# Altium PCB PCB-DC-DC-24-15_v.2.PcbDoc
Units mil, origin at the board's own origin, x right, y up, seen from the top; angles counter-clockwise.
Board outline 1456.69 x 1496.06 mil, 2 copper layers (Top Layer, Bottom Layer); 34 components, 20 nets, 91 pads, 26 vias.
Unrouted connection lines stored in the file: 1.
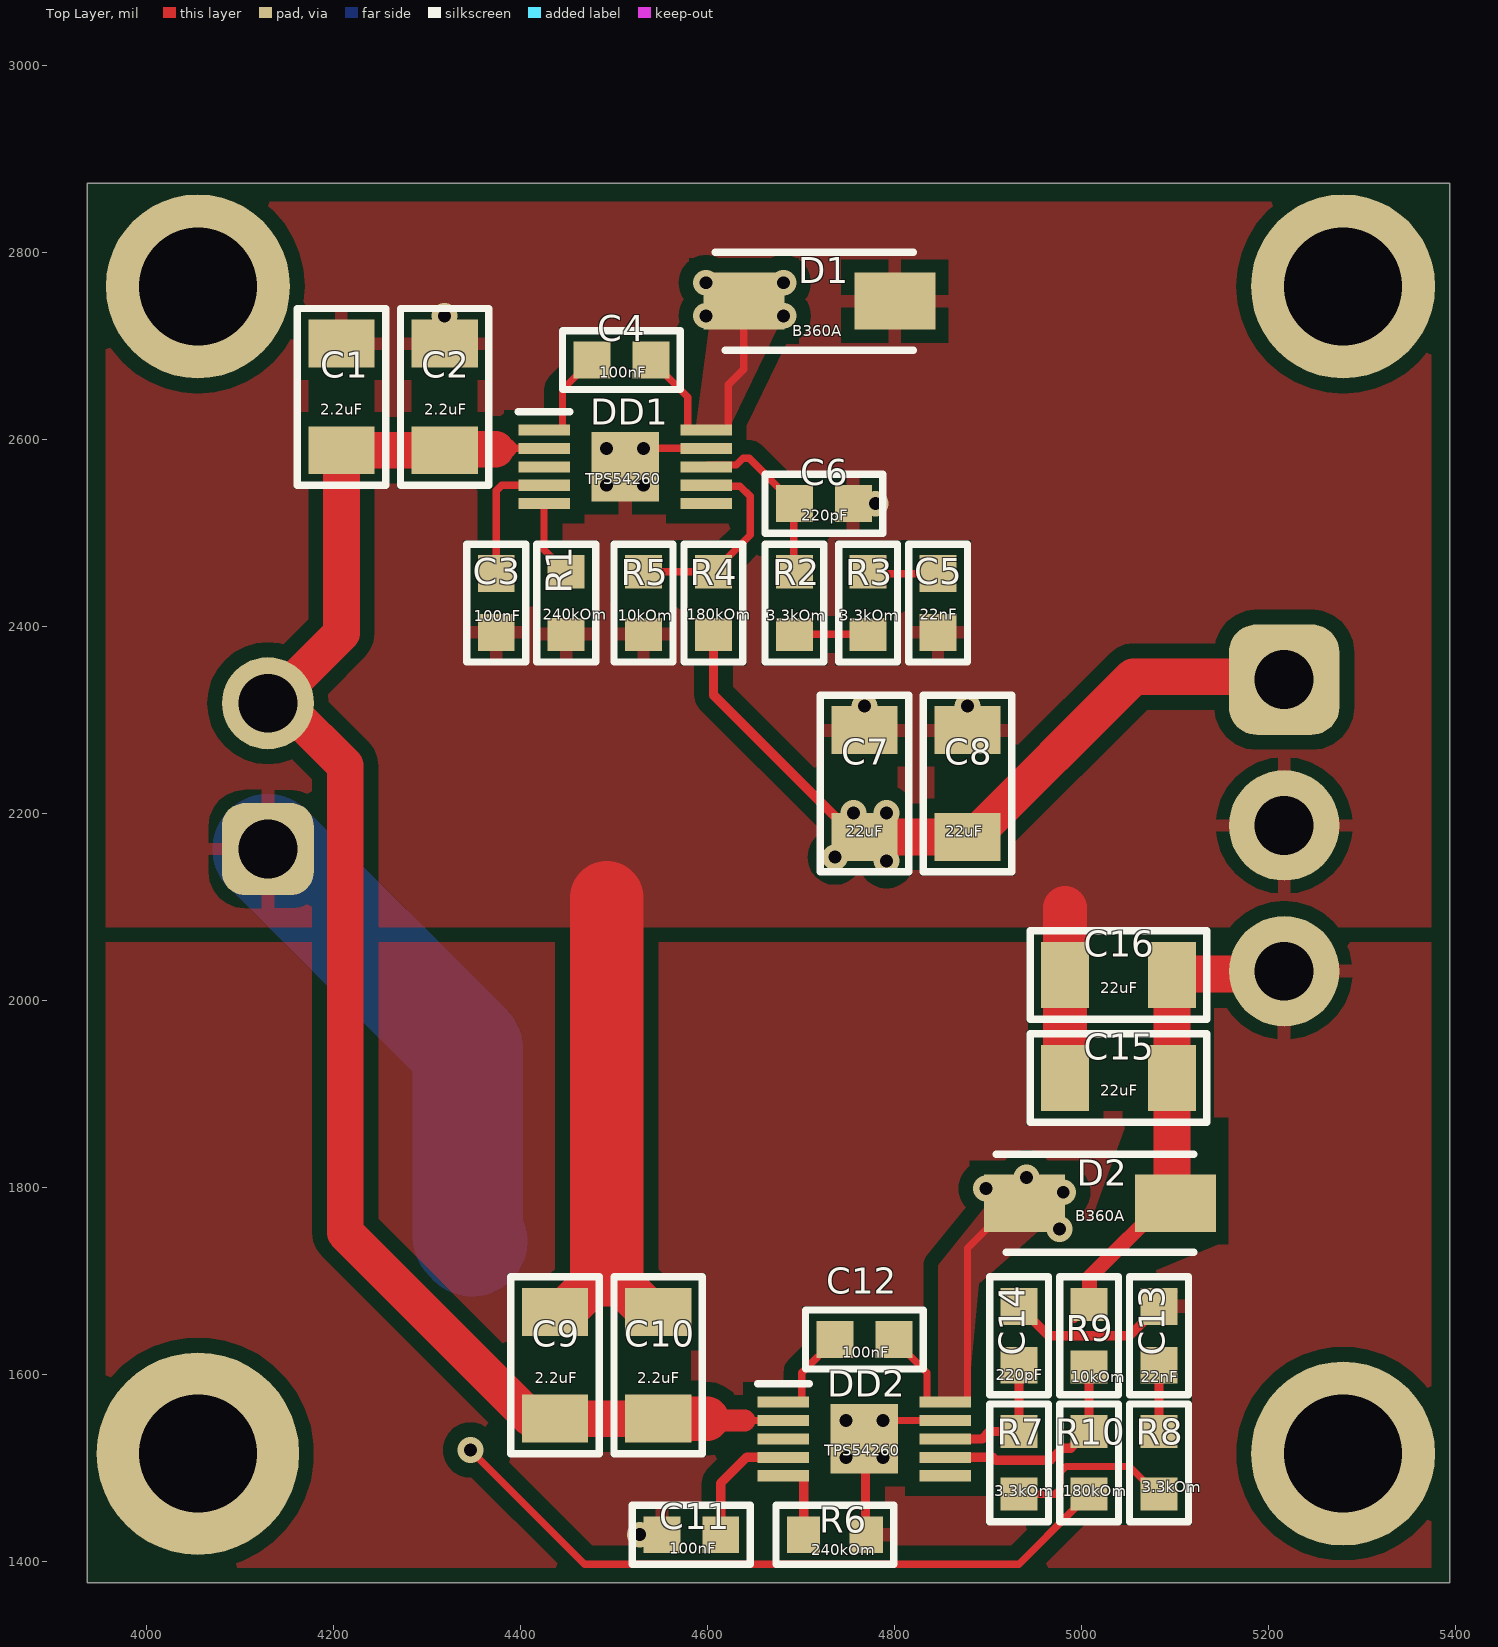
[diagram p0: Top Layer view]
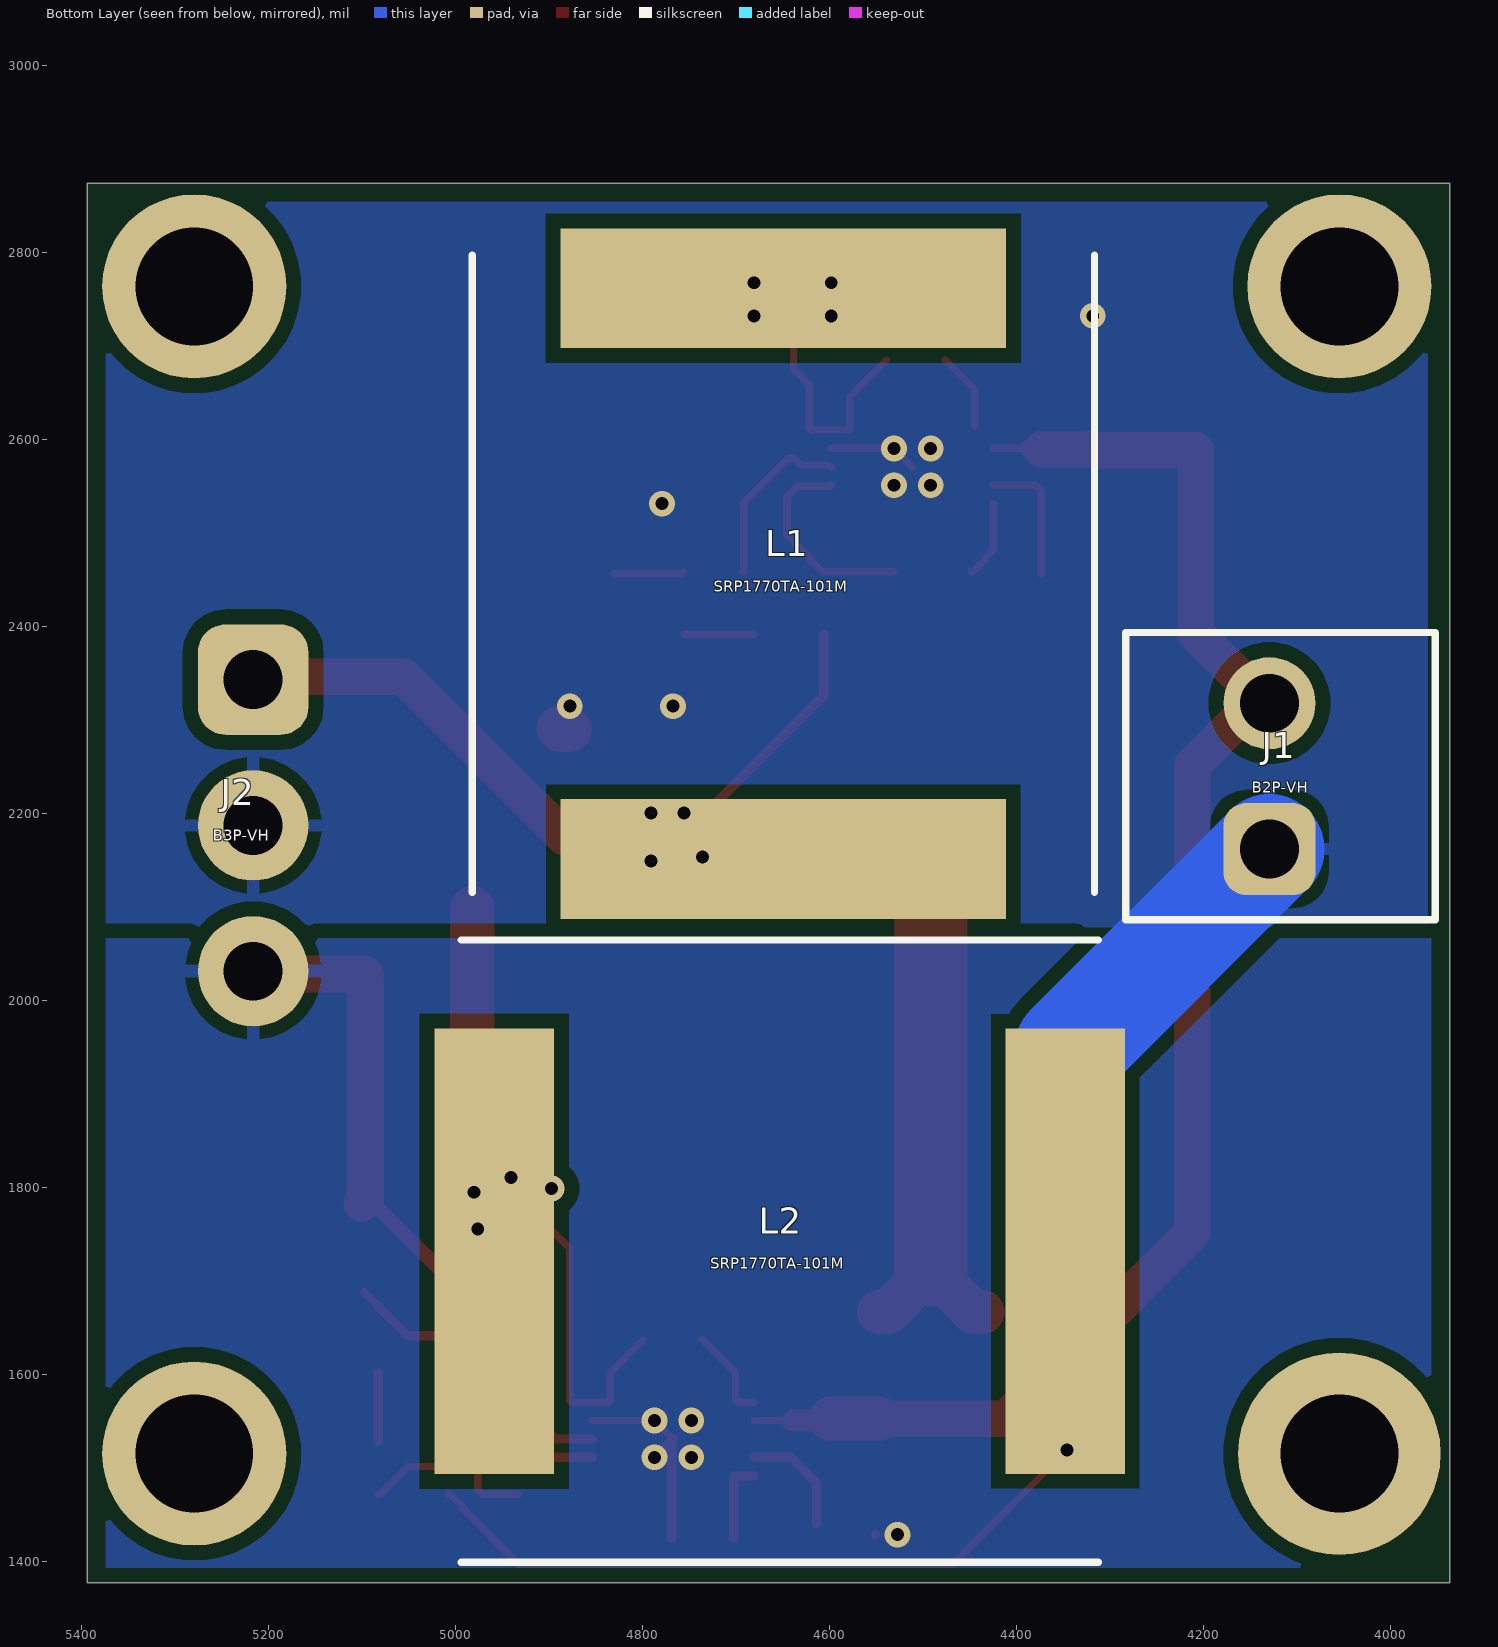
[diagram p1: Bottom Layer view, seen from below]
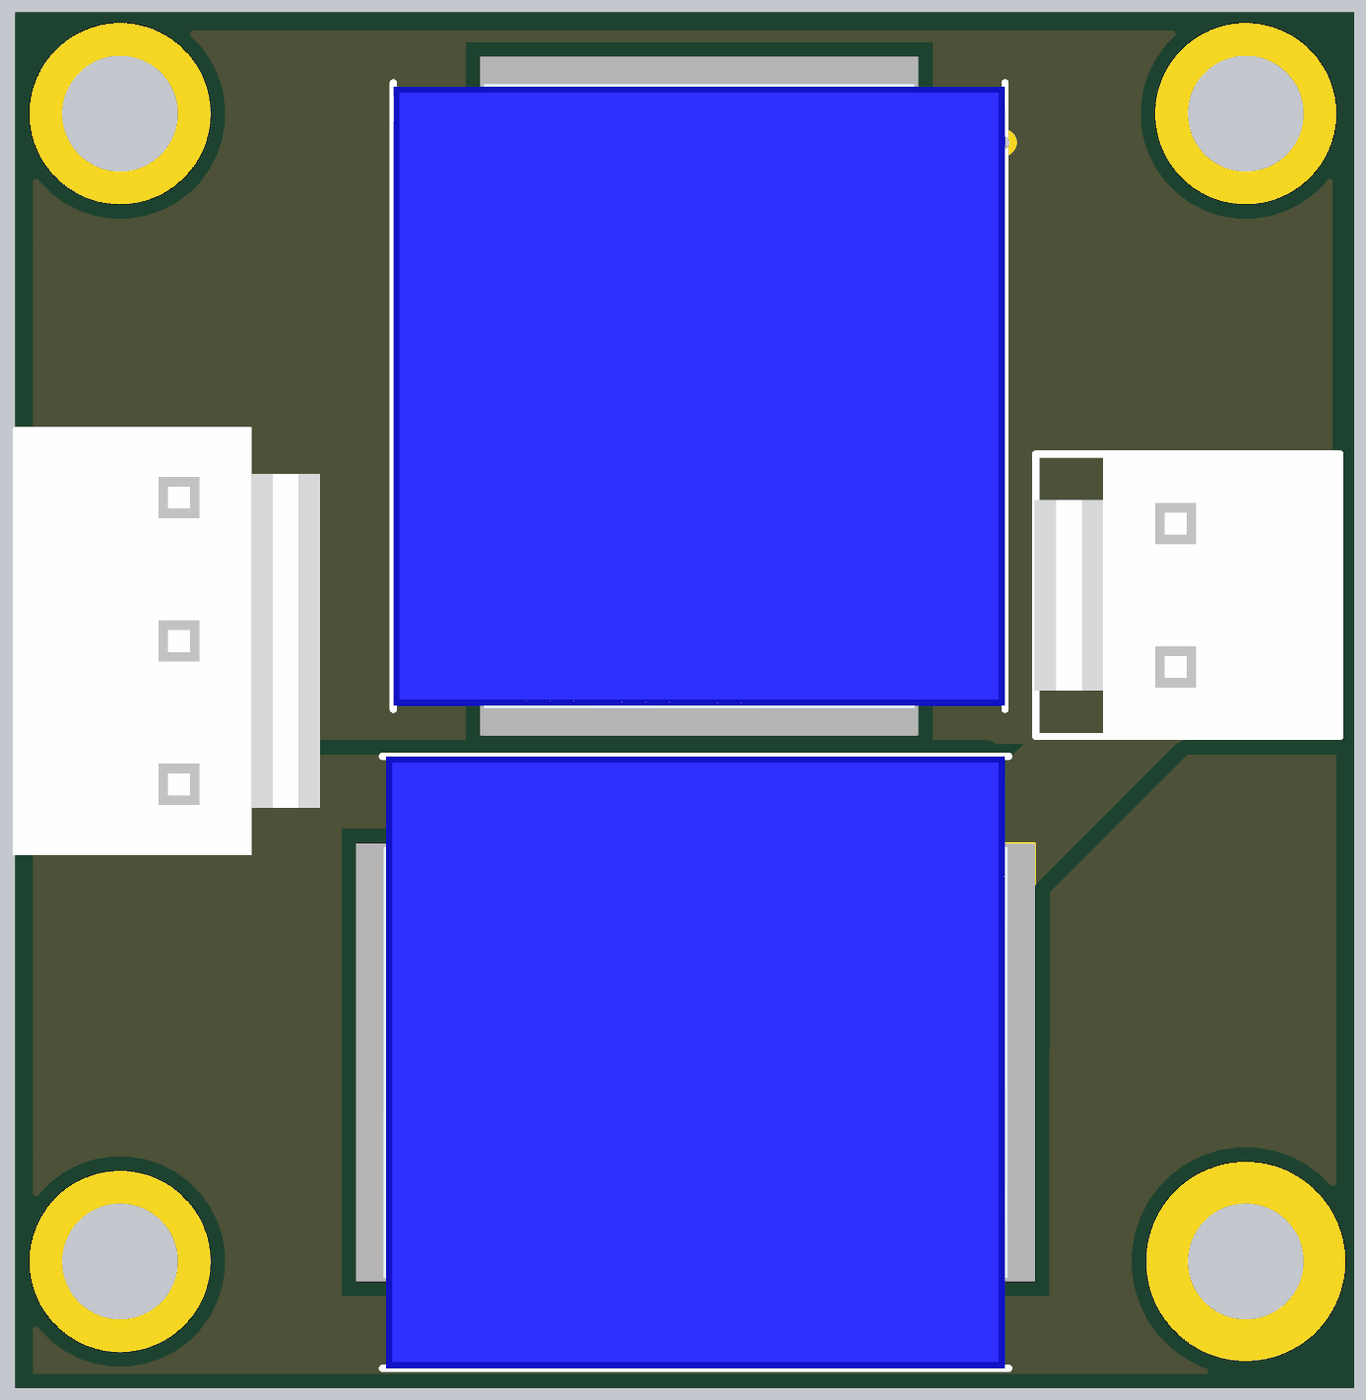
[diagram p2: 3D render of the assembled board from below, using the file's embedded part models]

## Layer stack, top to bottom
Top Solder: solder mask 0.4, Solder Resist, Dk 3.5
Top Layer: signal copper 1.4
Dielectric 1: dielectric 12.6, FR-4, Dk 4.8
Bottom Layer: signal copper 1.4
Bottom Solder: solder mask 0.4, Solder Resist, Dk 3.5

## Board outline
3937.01,1377.95 5393.7,1377.95 5393.7,2874.02 3937.01,2874.02

## Design rules (kind name [scope] priority, off if disabled: settings)
AcuteAngle [All] p1: minimum=3.50000000000000E+0001 checktracksonly=FALSE
BoardOutlineClearance "BoardOutlineClearance 1" [All] p1: gap=9.84 ignorepadtopadclearanceinfootprint=FALSE except(0: Arc-SplitContinuation Track-SplitContinuation SMDPad-SplitContinuation THPad-SplitContinuation Via-SplitContinuation Fill-SplitContinuation Poly-SplitContinuation Region-SplitContinuation Text-SplitContinuation) // Milling
BoardOutlineClearance "BoardOutlineClearance 2" [All] p2: gap=15.75 ignorepadtopadclearanceinfootprint=FALSE except(0: Arc-SplitContinuation Track-SplitContinuation SMDPad-SplitContinuation THPad-SplitContinuation Via-SplitContinuation Fill-SplitContinuation Poly-SplitContinuation Region-SplitContinuation Text-SplitContinuation) // V-Cut
Clearance "Clearance-1 1 Oz" [All] p1: gap=15.75 ignorepadtopadclearanceinfootprint=FALSE except(3.94: Arc-Arc Arc-Track Track-Track SMDPad-SMDPad; 5.91: THPad-THPad; 7.87: Arc-SMDPad Arc-THPad Arc-Via Arc-Text Track-SMDPad Track-THPad Track-Via Track-Text SMDPad-THPad SMDPad-Via SMDPad-Text THPad-Via THPad-Text Via-Via Via-Text Fill-Text Poly-Text Region-Text Text-Text; 9.84: Arc-Hole Track-Hole SMDPad-Hole THPad-Hole Via-Hole Fill-Hole Poly-Hole Region-Hole Text-Hole) // Standart
DiffPairsRouting "DiffPairsRouting 1 Oz" [All] p1: maxlimit=10 minlimit=3.94 mostfreqgap=10 toplayer_minwidth=7.87 toplayer_maxwidth=15 toplayer_prefwidth=15 bottomlayer_minwidth=7.87 bottomlayer_maxwidth=15 bottomlayer_prefwidth=15 maxuncoupledlength=500
HoleSize "Minimum HoleSize" [IsPad] p1: absolutevalues=TRUE maxlimit=232.28 minlimit=23.62 maxpercent=80.000 minpercent=20.000
HoleSize "Minimum HoleSize VIA 1" [IsVia] p2: absolutevalues=TRUE maxlimit=232.28 minlimit=11.81 maxpercent=80.000 minpercent=20.000 // Standart
HoleSize "Minimum HoleSize VIA 2" [IsVia] p3: absolutevalues=TRUE maxlimit=232.28 minlimit=7.87 maxpercent=80.000 minpercent=20.000 // Advance
HoleToHoleClearance Hole2HoleClearance [All] p1: gap=9.84 allowstackedmicrovias=FALSE
MinimumAnnularRing "Minimum AR VIA Standart" [IsVia] p1: minimumring=5.91
MinimumAnnularRing "Minimum AR PAD Standart" [IsPAD] p2: minimumring=7.87
MinimumAnnularRing "Minimum AR VIA Advance" [IsVia] p3: minimumring=3.94
MinimumAnnularRing "Minimum AR PAD Advance" [IsPAD] p4: minimumring=5.91
MinimumSolderMaskSliver "SolderMask Bridge Standart" [All] p1: minsoldermaskwidth=1.97 // All Masks
PlaneClearance "PlaneClearance 3 Oz" [All] p1: clearance=13.78
PlaneClearance "PlaneClearance 2 Oz" [All] p2: clearance=11.81
PlaneClearance "PlaneClearance 1 Oz" [All] p3: clearance=7.87
PlaneClearance "PlaneClearance-1 1/2 Oz" [All] p4: clearance=7.87 // Standart
PlaneClearance "PlaneClearance-2 1/2 Oz" [All] p5: clearance=5.91 // Advance
PlaneConnect "TermalConnect 3 Oz" [All] p1: planeconnectstyle=Relief reliefexpansion=7.87 reliefentries=4 reliefconductorwidth=13.78 reliefairgap=13.78 // Standart
PlaneConnect "TermalConnect 2 Oz" [All] p2: planeconnectstyle=Relief reliefexpansion=7.87 reliefentries=4 reliefconductorwidth=11.81 reliefairgap=11.81 // Standart
PlaneConnect "TermalConnect-1 1 Oz" [All] p3: planeconnectstyle=Relief reliefexpansion=7.87 reliefentries=4 reliefconductorwidth=7.87 reliefairgap=7.87 // Standart
PlaneConnect "TermalConnect-2 1 Oz" [All] p4: pad.planeconnectstyle=Relief pad.reliefexpansion=5.91 pad.reliefentries=4 pad.reliefconductorwidth=7.87 pad.reliefairgap=7.87 via.planeconnectstyle=Direct via.reliefexpansion=5.91 via.reliefentries=4 via.reliefconductorwidth=5.91 via.reliefairgap=5.91 // Advance
PlaneConnect "TermalConnect-1 1/2 Oz" [All] p5: planeconnectstyle=Relief reliefexpansion=7.87 reliefentries=4 reliefconductorwidth=7.87 reliefairgap=7.87 // Standart
PlaneConnect "TermalConnect-2 1/2 Oz" [All] p6: pad.planeconnectstyle=Relief pad.reliefexpansion=5.91 pad.reliefentries=4 pad.reliefconductorwidth=5.91 pad.reliefairgap=5.91 via.planeconnectstyle=Direct via.reliefexpansion=5.91 via.reliefentries=4 via.reliefconductorwidth=5.91 via.reliefairgap=5.91 // Advance
PolygonConnect PolygonConnect_2 [All vs IsVia] p1: connectstyle=Direct reliefconductorwidth=10 reliefentries=4 polygonreliefangle="90 Angle" airgapwidth=10
PolygonConnect PolygonConnect_1 [All vs InNet('NetC4_1')] p2: connectstyle=Direct reliefconductorwidth=10 reliefentries=4 polygonreliefangle="90 Angle" airgapwidth=10
PolygonConnect [All vs InNet('NetC12_1')] p3: connectstyle=Direct reliefconductorwidth=10 reliefentries=4 polygonreliefangle="90 Angle" airgapwidth=10
PolygonConnect "PolygonConnect 3 Oz" [All] p4: thpad.connectstyle=Relief thpad.reliefconductorwidth=13.78 thpad.reliefentries=4 thpad.polygonreliefangle="90 Angle" thpad.airgapwidth=13.78 smdpad.connectstyle=Relief smdpad.reliefconductorwidth=13.78 smdpad.reliefentries=4 smdpad.polygonreliefangle="90 Angle" smdpad.airgapwidth=13.78 via.connectstyle=Direct via.reliefconductorwidth=10 via.reliefentries=4 via.polygonreliefangle="90 Angle" via.airgapwidth=10
RoutingCorners [All] p1 off: cornerstyle=45-Degree minsetback=100 maxsetback=100
RoutingVias [All] p1: holewidth=11.81 width=23.62 viastyle="Through Hole" minholewidth=7.87 minwidth=15.75 maxholewidth=232.28 maxwidth=251.97
SilkToSilkClearance Silk2SilkClearance [All] p1 off: silktosilkclearance=5.91
SilkToSolderMaskClearance Silk2SolderMaskClearance [IsPad] p1 off: minsilkscreentomaskgap=5.91 clearancetoexposedcopper=TRUE
SolderMaskExpansion "SolderMaskExpansion LDI" [All] p1: expansion=0.98 istentingtop=FALSE // Advance
UnRoutedNet [All] p1: checkbadconnections=TRUE
Width "Width 1 Oz" [All] p1: maxlimit=393.7 minlimit=5.91 preferedwidth=7.87 checkconnectedcopper=TRUE
20 further rules are at their usual default settings.

## Components (designator, comment, footprint, x,y, rotation, side; value= is the part's Value field where it differs from the comment)
C1 "2.2uF" CAPC3216N 4208.66,2645.67 r270 top value=100pF
C2 "2.2uF" CAPC3216N 4318.9,2645.67 r270 top value=100pF
C3 "100nF" CAPC1608N 4374.02,2425.2 r90 top value=100pF
C4 "100nF" CAPC1608N 4507.87,2685.04 r180 top value=100pF
C5 "22nF" CAPC1608N 4846.46,2425.2 r90 top value=100pF
C6 "220pF" CAPC1608N 4724.41,2531.5 r180 top value=100pF
C7 "22uF" CAPC3216N 4767.72,2232.28 r270 top value=100pF
C8 "22uF" CAPC3216N 4877.95,2232.28 r270 top value=100pF
C9 "2.2uF" CAPC3216N 4437.01,1610.24 r270 top value=100pF
C10 "2.2uF" CAPC3216N 4547.24,1610.24 r270 top value=100pF
C11 "100nF" CAPC1608N 4582.68,1429.13 r0 top value=100pF
C12 "100nF" CAPC1608N 4767.72,1637.8 r180 top value=100pF
C13 "22nF" CAPC1608N 5082.68,1641.73 r270 top value=100pF
C14 "220pF" CAPC1608N 4933.07,1641.73 r270 top value=100pF
C15 "22uF" CAPC3216N 5039.37,1917.32 r0 top value=100pF
C16 "22uF" CAPC3216N 5039.37,2027.56 r0 top value=100pF
D1 "B360A" B360A 4719.49,2748.03 r0 top
D2 "B360A" B360A 5019.69,1783.46 r0 top
DD1 "TPS54260" TPS54260#1 4511.81,2570.87 r0 top
DD2 "TPS54260" TPS54260#2 4767.72,1531.5 r0 top
J1 "B2P-VH" B2P-VH 4129.92,2240.16 r90 bottom
J2 "B3P-VH" B3P-VH 5216.54,2265.35 r270 bottom
L1 "SRP1770TA-101M" SRP1770TA-101M 4649.61,2456.69 r270 bottom
L2 "SRP1770TA-101M" SRP1770TA-101M 4653.54,1732.28 r180 bottom
R1 "240kOm" RESC1608N 4448.82,2425.2 r90 top value=1K
R2 "3.3kOm" RESC1608N 4692.91,2425.2 r90 top value=1K
R3 "3.3kOm" RESC1608N 4771.65,2425.2 r270 top value=1K
R4 "180kOm" RESC1608N 4606.3,2425.2 r270 top value=1K
R5 "10kOm" RESC1608N 4531.5,2425.2 r90 top value=1K
R6 "240kOm" RESC1608N 4736.22,1429.13 r180 top value=1K
R7 "3.3kOm" RESC1608N 4933.07,1505.91 r90 top value=1K
R8 "3.3kOm" RESC1608N 5082.68,1505.91 r270 top value=1K
R9 "10kOm" RESC1608N 5007.87,1641.73 r90 top value=1K
R10 "180kOm" RESC1608N 5007.87,1505.91 r90 top value=1K

## Footprints (in the part's own frame and the unit in brackets; to place one, negate y for a bottom-side part, rotate by r counter-clockwise, add the part's x,y. Pads: shape width x height; smd on the part's side, far side on the other; paste and mask are expansions set on the pad)
B2P-VH [mm]
  rrect50% 2.5x2.5 hole 1.6: 1(-1.98,0)
  round 2.5 hole 1.6: 2(1.98,0)
  silkscreen extent -3.9,-4.5 3.9,3.9, body extent -3.93,-4.56 3.93,3.94, height 10.9
B3P-VH [mm]
  rrect50% 3x3 hole 1.6: 1(-1.98,0)
  round 3 hole 1.6: 2(1.98,0) 3(5.94,0)
  body extent -4.01,-4.57 7.81,3.93, height 10.9
B360A [mm]
  rect 2.2x1.55 smd: 1(-2.05,0) 2(2.05,0)
  silkscreen extent -2.83,-1.33 2.55,1.33, body extent -2.55,-1.33 2.55,1.33, height 2.29
CAPC1608N [mm] "Chip Capacitor, Body 1.6x0.8mm, IPC Medium Density"
  rect 1x1 smd: 1(-0.8,0) 2(0.8,0)
  Top Layer pour cut-out: -0.3,0.5 0.3,0.5 0.3,-0.5 -0.3,-0.5
  silkscreen extent -1.6,-0.8 1.6,0.8, body extent -0.87,-0.48 0.87,0.48, height 0.85
CAPC3216N [mm] "Chip Capacitor, Body 3.2x1.6mm, IPC Medium Density"
  rect 1.3x1.8 smd: 1(-1.45,0) 2(1.45,0)
  Top Layer pour cut-out: -0.8,0.9 0.8,0.9 0.8,-0.9 -0.8,-0.9
  silkscreen extent -2.4,-1.2 2.4,1.2, body extent -1.7,-0.9 1.7,0.9, height 1.35
RESC1608N [mm] "Chip Resistor, Body 1.6x0.8mm, IPC Medium Density"
  rect 0.9x1 smd: 1(-0.85,0) 2(0.85,0)
  Top Layer pour cut-out: -0.4,0.5 0.4,0.5 0.4,-0.5 -0.4,-0.5
  silkscreen extent -1.6,-0.8 1.6,0.8, body extent -0.85,-0.48 0.85,0.48, height 0.6
SRP1770TA-101M [mm]
  rect 3.25x12.1 smd: 1(-7.75,0) 2(7.75,0)
  silkscreen extent -8.65,-8.45 8.65,8.45, body extent -8.65,-8.45 8.65,8.45, height 7
TPS54260#1 [mm]
  rect 1.4x0.3 smd: 1(-2.2,1) 2(-2.2,0.5) 3(-2.2,0) 4(-2.2,-0.5) 5(-2.2,-1) 6(2.2,-1) 8(2.2,0) 10(2.2,1)
  rect 1.4x0.3 smd paste+0 mask+0.025: 7(2.2,-0.5)
  rect 1.4x0.3 smd paste+0: 9(2.2,0.5)
  rect 1.83x1.89 smd: 11(0,0)
  silkscreen extent -2.9,1.5 -1.5,1.5, body extent -2.46,-1.5 2.46,1.5, height 0.96
TPS54260#2 [mm]
  rect 1.4x0.3 smd: 1(-2.2,1) 2(-2.2,0.5) 3(-2.2,0) 4(-2.2,-0.5) 5(-2.2,-1) 6(2.2,-1) 7(2.2,-0.5) 8(2.2,0) 9(2.2,0.5) 10(2.2,1)
  rect 1.83x1.89 smd: 11(0,0)
  silkscreen extent -2.9,1.5 -1.5,1.5, body extent -2.46,-1.5 2.46,1.5, height 0.96

## Part data
C1 C2 C7 C8 C9 C10 C15 C16: library part "Cap 3216 (1206)", "Capacitor"
C3 C4 C5 C6 C11 C12 C13 C14: library part "Cap 1608 (0603)", "Capacitor"
J1: "B2P-VH (JST 3.96mm)"
J2: "B3P-VH (JST 3.96mm)"
R1 R2 R3 R4 R5 R6 R7 R8 R9 R10: library part "Res 1608 (0603)", "Resistor 1608 (0603)"

## Free pads (board coordinates)
  round 216.54 hole 125.98: 6(4055.12,1515.75)
  round 196.85 hole 125.98: 6(4055.12,2763.78) 6(5279.53,1515.75) 6(5279.53,2763.78)

## Via types
v1: diameter 27.56, hole 13.78, Top Layer to Bottom Layer, 26 vias

## Nets (pads, with @x,y where several pads share a name; then routed paths per layer and width w, separated by ;. In a path a pad name is that pad's centre, name@x,y a point inside that pad or via, vN(x,y) a via of type N, cw(c..) or ccw(c..) an arc to the next point about the centre after c; other vN are vias at no path point)
-15V: C11.1 C13.1 C14.1 C15.2 C16.2 D2.2 DD2.9 DD2.11 J2.3 R6.1 R9.2 | length 956.7
  Top Layer w7.87: DD2.11 v1(4787.4,1551.18) DD2.9 ; R9.2@4992.13,1659.45 4992.13,1661.42 4996.06,1665.35 R9.2@4998.03,1665.35 ; C13.1 C13.1@5098.43,1688.98
  Top Layer w10: DD2.11 DD2.11@4768.91,1530.31 ; R6.1@4769.69,1425.2 4768.91,1425.98 DD2.11@4768.91,1530.31 ; v1(4787.4,1511.81) DD2.11@4768.91,1530.31 ; C14.1 4964.57,1641.73 5051.18,1641.73 C13.1
  Top Layer w15.75: R9.2@4998.03,1665.35 R9.2 5008.37,1675.69 5008.37,1704.23 5093.5,1789.37 D2.2@5096.46,1789.37
  Top Layer w39.37: C16.2@5096.46,2015.75 C15.2 5096.46,1789.37 5096.46,1787.4 D2.2 ; C16.2 5097.58,2028.68 5202.69,2028.68 J2.3@5212.6,2038.58
  other v1: 4527.56,1429.13 4748.03,1511.81 4748.03,1551.18
GND: C1.1 C2.1 C3.1 C5.1 C6.1 C7.1 C8.1 C9.1 C10.1 C15.1 C16.1 D1.2 DD1.9 DD1.11 J1.1 J2.2 L2.2 R1.1 R5.1 R10.1 | length 2099.9
  Top Layer w7.87: v1(4346.46,1519.68) 4468.5,1397.64 4933.07,1397.64 4992.13,1456.69 4992.13,1458.66 5005.91,1472.44 R10.1 ; DD1.11 v1(4531.5,2590.55) DD1.9
  Top Layer w47.24: C9.1 4446.85,1667.32 4492.13,1712.6 4537.4,1667.32 C10.1 ; 4492.13,2110.24 4500,2118.11 ; C8.1 4887.8,2289.37 C8.1@4889.76,2291.34 ; C15.1 C16.1 4982.28,2099.3
  Top Layer w78.74: 4492.13,1712.6 4492.13,2110.24
  Bottom Layer w118.11: J1.1 4343.5,1948.62 4343.5,1748.03 L2.2@4348.64,1742.89
  other v1: 4767.72,2314.96 4877.95,2314.96 4779.53,2531.5 4492.13,2551.18 4531.5,2551.18 4492.13,2590.55 4318.9,2732.28
NetC1_2: C1.2 C2.2 C9.2 C10.2 DD1.2 DD2.2 J1.2 | length 1630.2
  Top Layer w7.87: 4386.36,2590.55 DD1.2 ; 4639.49,1551.18 DD2.2
  Top Layer w19.68: 4373.3,2589.7 4385.51,2589.7 4386.36,2590.55
  Top Layer w23.62: 4599.27,1553.15 4601.24,1551.18 4639.48,1551.18
  Top Layer w39.37: J1.2@4153.15,2320.38 4153.15,2310.86 4212.55,2251.47 4212.55,1752.02 4411.42,1553.15 C9.2 C10.2 ; J1.2@4153.15,2337.4 4208.66,2392.91 C1.2 C2.2@4314.96,2588.58 ; C2.2@4320.87,2590.55 4321.72,2589.7 4373.3,2589.7
  Top Layer w47.24: C10.2 4599.27,1553.15
NetC3_2: C3.2 DD1.4 | length 142.2
  Top Layer w7.87: C3.2 4374.02,2545.22 4379.87,2551.08 4425.09,2551.08 DD1.4
NetC4_1: C4.1 D1.1 DD1.10 L1.1 | length 291.8
  Top Layer w7.87: C4.1 4562.99,2661.42 4578.86,2645.55 4578.86,2611.14 4579.76,2610.24 DD1.10 4620.08,2610.24 4622.05,2612.2 4622.05,2658.46 4638.78,2675.2 D1.1 D1.1@4628.59,2737.84
  other v1: 4598.43,2732.28 4681.1,2732.28 4598.43,2767.72 4681.1,2767.72
NetC4_2: C4.2 DD1.1 | length 83.9
  Top Layer w7.87: DD1.1@4444.88,2614.17 4444.88,2653.54 C4.2
NetC5_2: C5.2 R3.1 | length 75.6
  Top Layer w7.87: R3.1@4755.91,2458.66 4757.87,2456.69 C5.2@4830.71,2456.69
NetC6_2: C6.2 DD1.8 R2.2 | length 191.7
  Top Layer w7.87: DD1.8 4600.39,2572.83 4630.88,2572.83 4637.96,2579.92 4644.49,2579.92 C6.2 4692.19,2530.77 4692.19,2459.38 R2.2
NetC7_2: C7.2 C8.2 J2.1 L1.2 R4.2 | length 823.7
  Top Layer w10: R4.2 4606.3,2326.77 4737.28,2195.79 4742.13,2190.95 4757.87,2175.2 C7.2 4755.91,2187.01 v1(4755.91,2200.79)
  Top Layer w39.37: C7.2 4883.86,2175.2 5055.12,2346.46 J2.1@5200.79,2346.46
  other v1: 4791.34,2149.61 4736.22,2153.54 4791.34,2200.79
NetC11_2: C11.2 DD2.4 | length 121.7
  Top Layer w10: C11.2@4614.17,1440.94 4614.17,1484.25 4641.73,1511.81 DD2.4
NetC12_1: C12.1 D2.1 DD2.10 L2.1 | length 364.7
  Top Layer w7.87: C12.1 4834.65,1602.36 4834.65,1572.83 4836.61,1570.87 DD2.10 4875.98,1570.87 4877.95,1572.83 4877.95,1735.24 4918.31,1775.59 D2.1@4926.18,1775.59
  Top Layer w39.37: D2.1@4926.18,1775.59 D2.1@4938.98,1775.59
  other v1: 4976.38,1755.91 4980.31,1795.28 4897.64,1799.21 4940.94,1811.02
NetC12_2: C12.2 DD2.1 | length 100.1
  Top Layer w7.87: DD2.1 4698.82,1570.87 4700.79,1572.83 4700.79,1602.36 C12.2
NetC13_2: C13.2 R8.1 | length 72.8
  Top Layer w10: R8.1@5082.68,1529.53 C13.2@5082.68,1602.36
NetC14_2: C14.2 DD2.8 R7.2 | length 155.3
  Top Layer w10: DD2.8 4893.7,1531.5 4901.57,1539.37 R7.2 ; R7.2@4918.39,1545.98 4921.26,1548.85 R7.2@4921.26,1551.18 ; R7.2@4933.07,1543.31 C14.2
NetDD1_5: DD1.5 R1.2 | length 83.8
  Top Layer w7.87: DD1.5 4425.2,2482.28 4434.13,2473.35 4434.13,2471.38 4446.85,2458.66 R1.2
NetDD1_7: DD1.7 R4.1 R5.2 | length 225.1
  Top Layer w7.87: R5.2 R4.1 4608.27,2458.66 4620.98,2471.38 4620.98,2473.35 4645.67,2498.03 4645.67,2539.37 4634.76,2550.28 4599.33,2550.28 DD1.7
NetDD2_5: DD2.5 R6.2 | length 88.1
  Top Layer w10: DD2.5 4701.85,1492.13 4702.76,1491.22 R6.2@4702.76,1425.2
NetDD2_7: DD2.7 R9.1 R10.2 | length 236.4
  Top Layer w10: DD2.7 4905.02,1511.81 4908.05,1508.78 4966.33,1508.78 4979.21,1521.65 4988.19,1521.65 5005.91,1539.37 R10.2 R9.1
NetR2_1: R2.1 R3.2 | length 74.8
  Top Layer w7.87: R2.1@4681.1,2391.73 R3.2@4755.91,2391.73
NetR7_1: R7.1 R8.2 | length 184.6
  Top Layer w7.87: R7.1 4971.77,1472.44 4976.38,1477.05 4976.38,1495.05 4983.3,1501.97 4992.28,1501.97 5051.18,1501.97 5080.71,1472.44 R8.2
pads on no net: DD1.3 DD1.6 DD2.3 DD2.6

## Polygon pours and split planes (outlines as drawn)
GND on Top Layer "TOP_GND" (solid, pour order 14): 3956.69,2078.74 3956.69,2854.33 5374.02,2854.33 5374.02,2078.74
-15V on Top Layer "-15V_L01_P015" (solid, pour order 15): 3956.69,2066.93 5374.02,2066.93 5374.02,1393.7 3956.69,1393.7
NetC4_1 on Top Layer "NETC4_1_L01_P007" (solid, pour order 7): 4602.36,2724.41 4587.06,2610.24 4623.23,2610.24 4626.41,2619.14 4677.17,2724.41
NetC12_1 on Top Layer "NETC12_1_L01_P008" (solid, pour order 8): 4909.45,1795.28 4846.46,1717.05 4846.46,1570.87 4877.95,1570.87 4890.05,1697.38 4925.2,1728.35 4977.44,1774.38
GND on Bottom Layer "GND_L02_P012" (solid, pour order 12): 3960.63,2854.33 3960.63,2078.74 5374.02,2078.74 5374.02,2854.33
-15V on Bottom Layer "-15V_L02_P009" (solid, pour order 9): 3956.69,2066.93 3956.69,1393.7 5374.02,1393.7 5374.02,2066.93

## Other copper
Top Layer:
  pour cut-out: 5110.24,2062.99 5208.66,2062.99 5208.66,1992.13 5110.24,1992.13
  pour cut-out: 5050.38,1875.23 5157.48,1875.23 5157.48,1744.09 5016.66,1685.04 4980.56,1685.04
  pour cut-out: 5043.31,2074.8 5141.73,2074.8 5141.73,1868.11 5043.31,1868.11

## Silkscreen, mask and mechanical layers (free items; w line width, h text height)
Mechanical 4:
  the board outline again, w7.87